# Altium PCB PWR_PCB.PcbDoc
Units mil, origin at the board's own origin, x right, y up, seen from the top; angles counter-clockwise.
Board outline 1730 x 1105 mil, 2 copper layers (Top Layer, Bottom Layer); 30 components, 23 nets, 105 pads, 71 vias.
Unrouted connection lines stored in the file: 28.
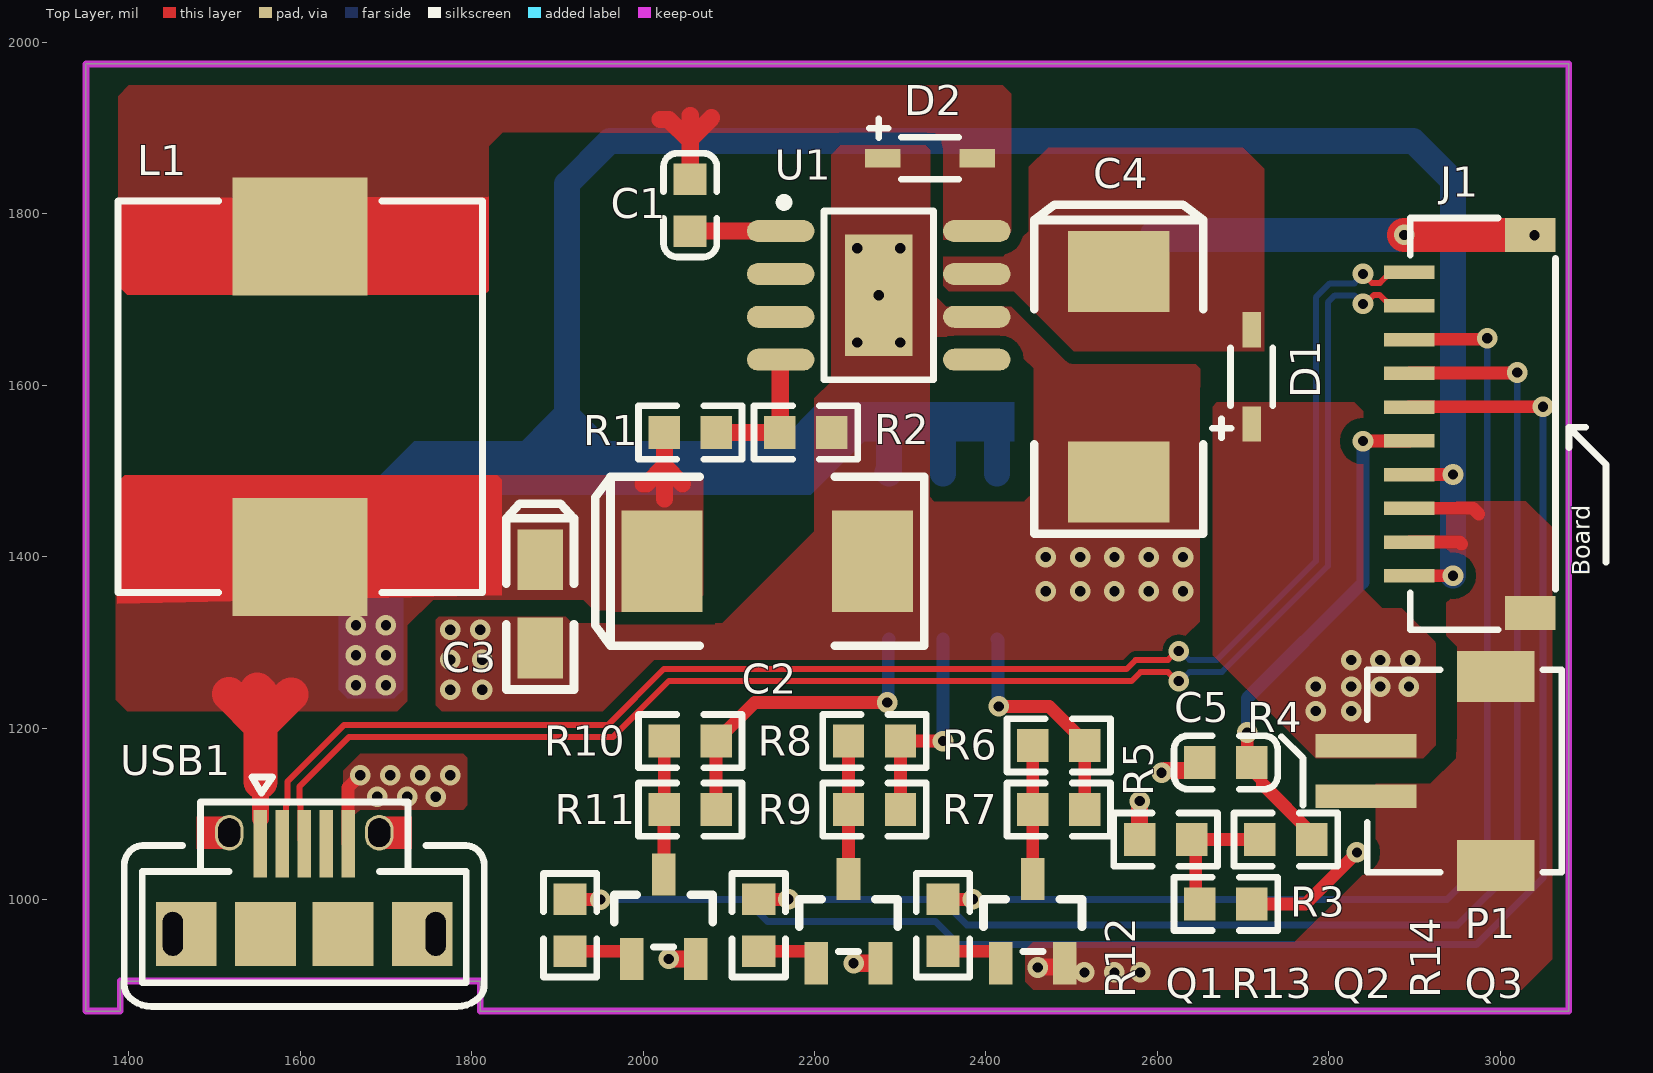
[diagram p0: Top Layer view]
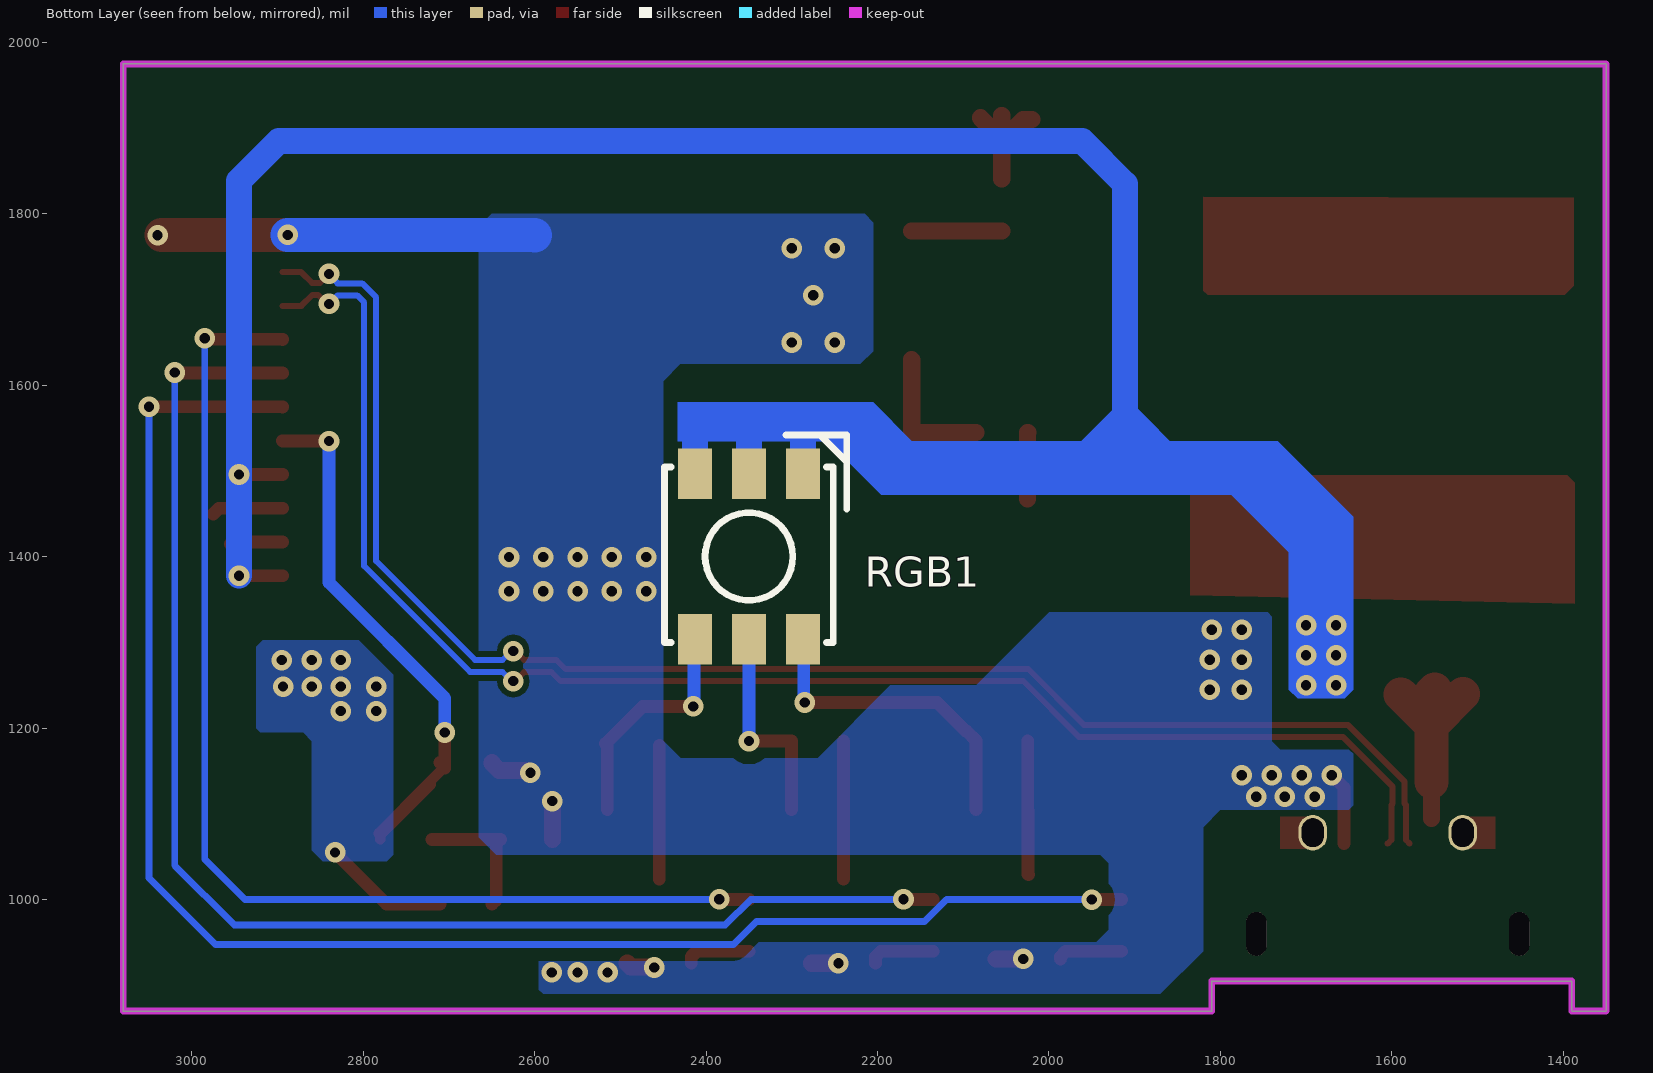
[diagram p1: Bottom Layer view, seen from below]
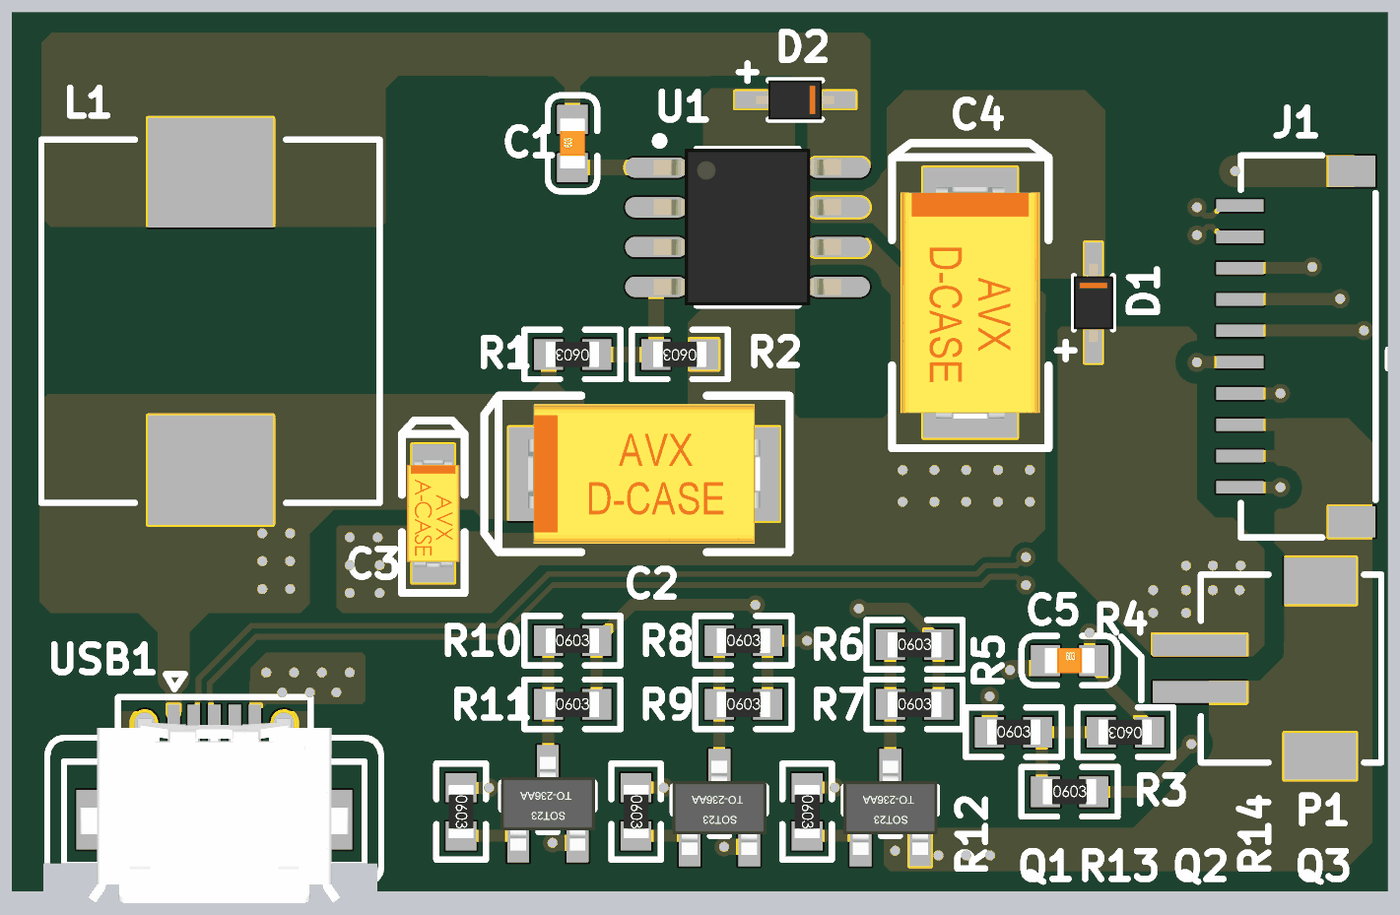
[diagram p2: 3D render of the assembled board from above, using the file's embedded part models]

## Layer stack, top to bottom
Top Solder: solder mask 0.4, Solder Resist, Dk 3.5
Top Layer: signal copper 1.4
Dielectric 1: dielectric 12.6, FR-4, Dk 4.8
Bottom Layer: signal copper 1.4
Bottom Solder: solder mask 0.4, Solder Resist, Dk 3.5

## Board outline
1350,870 1350,1975 3080,1975 3080,870 1810,870 1810,905 1390,905 1390,870

## Design rules (kind name [scope] priority, off if disabled: settings)
Clearance Clearance_1 [InComponent('USB1')] p1: gap=6 ignorepadtopadclearanceinfootprint=TRUE
Clearance DIFF [InDifferentialPairClass('90Ohm')] p2: gap=7 ignorepadtopadclearanceinfootprint=TRUE
Clearance [All] p3: gap=15 ignorepadtopadclearanceinfootprint=TRUE except(0: Arc-Hole Track-Hole SMDPad-Hole THPad-Hole Via-Hole Fill-Hole Poly-Hole Region-Hole Text-Hole; 10: Arc-SMDPad Arc-THPad Arc-Via Arc-Text Track-SMDPad Track-THPad Track-Via Track-Text SMDPad-SMDPad SMDPad-THPad SMDPad-Via SMDPad-Text THPad-THPad THPad-Via THPad-Text Via-Via Via-Text Fill-Text Poly-Text Region-Text Text-Text)
DiffPairsRouting [InDifferentialPairClass('90Ohm')] p1: maxlimit=7 minlimit=7 mostfreqgap=7 toplayer_minwidth=7 toplayer_maxwidth=7 toplayer_prefwidth=7 bottomlayer_minwidth=7 bottomlayer_maxwidth=7 bottomlayer_prefwidth=7 maxuncoupledlength=500
PolygonConnect PolygonConnect_1 [InNetClass('PWR')] p1: connectstyle=Direct reliefconductorwidth=10 reliefentries=4 polygonreliefangle="90 Angle" airgapwidth=10
PolygonConnect VIA [IsVia] p2: connectstyle=Direct reliefconductorwidth=10 reliefentries=4 polygonreliefangle="90 Angle" airgapwidth=10
PolygonConnect [All] p3: connectstyle=Direct reliefconductorwidth=12 reliefentries=4 polygonreliefangle="90 Angle" airgapwidth=15
RoutingVias [All] p1: holewidth=30 width=60 viastyle="Through Hole" minholewidth=12 minwidth=24 maxholewidth=15 maxwidth=30
SolderMaskExpansion [All] p1: expansion=2.5
Width DIFF-90Ohm [InDifferentialPairClass('90Ohm')] p1: maxlimit=8 minlimit=8 preferedwidth=8
Width PWR [InNetClass('PWR')] p2: maxlimit=60 minlimit=15 preferedwidth=30
Width [All] p3: maxlimit=60 minlimit=8 preferedwidth=12
29 further rules are at their usual default settings.

## Classes and differential pairs
net class PE0-2: LED1 LED1_N LED2 LED2_N LED3 LED3_N PE0 PE1 PE2
differential pair class 90Ohm: USB2.0
net class PWR: GND VCC_2S~6S VCC_5.0V VCC_IN
differential pair USB2.0: +OTG_FS_DP -OTG_FS_DM

## Components (designator, comment, footprint, x,y, rotation, side; value= is the part's Value field where it differs from the comment)
C1 "10nF/50V/0603" LC-0603_C 2055,1810.31 r90 top
C2 "47uF/7343" LC-CASE-D_7343 2145,1394.69 r180 top
C3 "10uF/1206" LC-CASE-A_3216 1880,1345 r90 top
C4 "100uF/35V/7343" LC-CASE-D_7343 2555,1610 r90 top
C5 "0.1uF/50V/0603" LC-0603_C 2680,1160 r0 top
D1 "1N5819/SOD-323" SOD_323_F 2710,1610 r90 top
D2 "1N5819/SOD-323" SOD_323_F 2335,1865 r0 top
J1 "USB_S" "SH 1.0-10P" 2964.53,1555 r90 top
L1 "CD54-22uH/2A" L_SMD_10040 1600,1586.69 r270 top
P1 "Comment" "ZH 1.5MM-2P" 2995,1150 r90 top
Q1 "SI2310/SOT-23" LC-SOT-23(SOT-23-3) 2024.06,980 r270 top
Q2 "SI2310/SOT-23" LC-SOT-23(SOT-23-3) 2239.69,975 r270 top
Q3 "SI2310/SOT-23" LC-SOT-23(SOT-23-3) 2454.69,975 r270 top
R1 "51K/1%/0603" LC-0603_R 2055,1545 r180 top
R2 "17K/1%/0603" LC-0603_R 2190,1545 r180 top
R3 "10K/1%/0603" LC-0603_R 2680,995 r0 top
R4 "1K/1%/0603" LC-0603_R 2750,1070 r180 top
R5 "1K/1%/0603" LC-0603_R 2609.68,1070 r0 top
R6 "50R/1%/0603" LC-0603_R 2485,1180 r0 top
R7 "50R/1%/0603" LC-0603_R 2485,1105 r0 top
R8 "50R/0603" LC-0603_R 2270,1185 r0 top
R9 "50R/1%/0603" LC-0603_R 2270,1105 r0 top
R10 "50R/1%/0603" LC-0603_R 2055,1185 r0 top
R11 "50R/1%/0603" LC-0603_R 2055,1105 r0 top
R12 "1K/1%/0603" LC-0603_R 1915,970 r270 top
R13 "1K/1%/0603" LC-0603_R 2135,970 r270 top
R14 "1K/1%/0603" LC-0603_R 2350,970 r270 top
RGB1 "RGB-LED" RGB-5050 2350,1400.32 r90 bottom
U1 "TPS5430" SOIC_8_PAD 2275,1705 r0 top
USB1 "MINI-USB" mini_usb_AB 1604.72,960 r0 top

## Footprints (in the part's own frame and the unit in brackets; to place one, negate y for a bottom-side part, rotate by r counter-clockwise, add the part's x,y. Pads: shape width x height; smd on the part's side, far side on the other; paste and mask are expansions set on the pad)
L_SMD_10040 [mm]
  rect 3.5x4 smd: 1(-4.75,0) 2(4.75,0)
  silkscreen extent -5.8,-5.4 5.8,5.4
LC-0603_C [mm]
  rect 0.93x0.98 smd: 1(-0.77,0) 2(0.77,0)
  silkscreen extent -1.53,-0.79 1.54,0.79, body extent -0.8,-0.4 0.8,0.4, height 0.3
LC-0603_R [mm]
  rect 0.93x0.98 smd: 1(-0.77,0) 2(0.77,0)
  silkscreen extent -1.53,-0.79 1.54,0.79, body extent -0.85,-0.4 0.85,0.4, height 0.56
LC-CASE-A_3216 [mm]
  rect 1.8x1.35 smd: 1(1.31,0) 2(-1.31,0)
  silkscreen extent -2.54,-1 2.97,1, body extent -1.7,-0.84 1.7,0.84, height 1.71
LC-CASE-D_7343 [mm]
  rect 2.4x3 smd: 1(3.12,0) 2(-3.12,0)
  silkscreen extent -4.65,-2.5 5.1,2.5, body extent -3.7,-2.23 3.7,2.22, height 3.01
LC-SOT-23(SOT-23-3) [mm]
  rect 1.25x0.7 smd: 1(1.25,-0.95) 2(-1.25,0) 3(1.25,0.95)
  silkscreen extent -0.65,-1.46 0.9,1.46, body extent -1.5,-1.5 1.5,1.5, height 1.3
mini_usb_AB [mm]
  oval 0.6x1.3 hole 0.6 slot 1.3 at 90 deg: 0(-3.895,0) 0(3.895,0)
  rect 1.8x1.9 smd: 0(-3.5,0) 0(-1.15,0) 0(1.15,0) 0(3.5,0)
  oval 0.85x1.05 hole 0.85 slot 0.65 at 0 deg: 0(-2.22,3) 0(2.22,3)
  rect 0.4x2 smd: 1(-1.3,2.675) 2(-0.65,2.675) 3(0,2.675) 4(0.65,2.675) 5(1.3,2.675)
  Top Layer region: -2.23,3.472 -3.193,3.472 -3.193,2.51 -2.23,2.51
  Top Layer region: 2.23,2.51 3.193,2.51 3.193,3.472 2.23,3.472
  silkscreen extent -5.33,-2.15 5.33,4.65, body extent -4.32,-2.67 4.33,3.23, height 2.85
RGB-5050 [mm]
  rect 1.5x1 smd: 1(2.45,-1.6) 2(2.45,0) 3(2.45,1.6) 4(-2.45,1.6) 5(-2.45,0) 6(-2.45,-1.6)
  silkscreen extent -2.55,-2.9 3.6,2.5, body extent -2.75,-2.5 2.75,2.5, height 1.4
"SH 1.0-10P" [mm]
  rect 1x1.5 smd: 0(-5.6,-1.79) 0(5.6,-1.79)
  rect 0.4x1.5 smd: 1(-4.5,1.79) 2(-3.5,1.79) 3(-2.5,1.79) 4(-1.5,1.79) 5(-0.5,1.79) 6(0.5,1.79) 7(1.5,1.79) 8(2.5,1.79) 9(3.5,1.79) 10(4.5,1.79)
  silkscreen extent -6.1,-4.04 6.1,1.76
SOD_323_F [mm]
  rect 1.05x0.55 smd: 1(-1.4,0) 2(1.4,0)
  silkscreen extent -1.8,-0.63 0.85,1.17, body extent -1.25,-0.63 1.25,0.62, height 1.01
SOIC_8_PAD [mm]
  rect 2x3.6 smd: 0(0,0)
  oval 2x0.65 smd: 1(-2.906,1.905) 2(-2.906,0.635) 3(-2.906,-0.635) 4(-2.906,-1.905) 5(2.906,-1.905) 6(2.906,-0.635) 7(2.906,0.635) 8(2.906,1.905)
  oval 2x0.65 on Mech16: 1(-2.906,1.905) 2(-2.906,0.635) 3(-2.906,-0.635) 4(-2.906,-1.905) 5(2.906,-1.905) 6(2.906,-0.635) 7(2.906,0.635) 8(2.906,1.905)
  silkscreen extent -2.93,-2.5 1.63,2.88, body extent -3,-2.5 3,2.5, height 1.8
"ZH 1.5MM-2P" [mm]
  rect 1.5x2.3 smd: 0(-2.8,0) 0(2.8,0)
  rect 0.7x3 smd: 1(0.75,3.85) 2(-0.75,3.85)
  silkscreen extent -3,-1.95 3,3.81

## Part data
C1 C5: library part Cap, "Capacitor", LatestRevisionDate=17-Jul-2002, LatestRevisionNote="Re-released for DXP Platform.", PackageDescription="Radial Cap, Thru-Hole; 2 Leads; 0.3 in Pin Spacing", PackageReference=RAD-0.3, Published=8-Jun-2000, Publisher="Altium Limited"
C2 C3 C4: library part "Cap Pol2", "Polarized Capacitor (Axial)", LatestRevisionDate=17-Jul-2002, LatestRevisionNote="Re-released for DXP Platform.", PackageDescription="Polarized Capacitor; 2 Leads", PackageReference=POLAR0.8, Published=8-Jun-2000, Publisher="Altium Limited"
D1 D2: library part 1N5819
Q1 Q2 Q3: library part SI2310
R1 R2 R3 R4 R5 R6 R7 R8 R9 R10 R11 R12 R13 R14: library part Res2, "Resistor", LatestRevisionDate=17-Jul-2002, LatestRevisionNote="Re-released for DXP Platform.", PackageDescription="Axial Device, Thru-Hole; 2 Leads; 0.4 in Pin Spacing", PackageReference=AXIAL-0.4, Published=8-Jun-2000, Publisher="Altium Limited"
RGB1: library part RGB-5050

## Via types
v1: diameter 24, hole 12, Top Layer to Bottom Layer, tented both sides, 71 vias

## Nets (pads, with @x,y where several pads share a name; then routed paths per layer and width w, separated by ;. In a path a pad name is that pad's centre, name@x,y a point inside that pad or via, vN(x,y) a via of type N, cw(c..) or ccw(c..) an arc to the next point about the centre after c; other vN are vias at no path point)
GND: C2.2 C3.2 C4.2 C5.1 D2.1 J1.0 J1.2 J1.3 P1.0 P1.2 Q1.3 Q2.3 Q3.3 R2.1 R5.1 U1.0 U1.6@2389.43,1680 USB1.5 | length 858.1
  Top Layer w15: USB1.5 1655.91,1130.91 v1(1670,1145) ; J1.2 2952.8,1417.2 2955,1415 ; J1.3 2968.43,1456.57 2975,1450
  Top Layer w20: v1(2030,930.79) Q1.3 ; v1(2245.63,925.79) Q2.3 ; v1(2460.63,920.79) 2461.39,921.55 2488.31,921.55 2492.09,925.33 Q3.3 ; R5.1 v1(2579.37,1115) ; v1(2605,1148.11) 2606.08,1148.11 2608.68,1150.71 2641.38,1150.71 2649.69,1159.02 C5.1
  Top Layer w40: v1(2888.02,1775.47) J1.0@3035,1775.47
  Bottom Layer w40: 2600,1775 2600.47,1775.47 v1(2888.02,1775.47)
  other v1: 2515,915 2550,915 2580,915 1690,1120 1725,1120 1758.07,1120 1705,1145 1740,1145 1775,1145 1775,1245 1812.5,1245 1775,1280 1812.5,1280 1775,1315 1810,1315 2470,1359.69 2510,1359.69 2550,1359.69 2590,1359.69 2630,1359.69 2470,1399.69 2510,1399.69 2550,1399.69 2590,1399.69 2630,1399.69 2250,1650 2300,1650 2275,1705 2250,1760 2300,1760 3040,1775
LED1: Q1.2 R10.1 R11.1 | length 156
  Top Layer w15: Q1.2 2024.37,1029.53 2024.37,1104.69 R11.1 R10.1
LED1_N: R10.2 R11.2 RGB1.6 | length 373.6
  Top Layer w15: R11.2 R10.2 2085.32,1185.98 2096.12,1196.79 2097.11,1196.79 2130.32,1230 v1(2285,1230)
  Bottom Layer w15: v1(2285,1230) 2286,1231 2286,1302.85 RGB1.6
LED2: Q2.2 R8.1 R9.1 | length 160.8
  Top Layer w15: Q2.2 R9.1 R8.1
LED2_N: R8.2 R9.2 RGB1.5 | length 248.5
  Top Layer w15: R9.2 R8.2 v1(2350,1185)
  Bottom Layer w15: v1(2350,1185) RGB1.5
LED3: Q3.2 R6.1 R7.1 | length 155.8
  Top Layer w15: Q3.2 R7.1 R6.1
LED3_N: R6.2 R7.2 RGB1.4 | length 276.3
  Top Layer w15: v1(2415,1225.39) 2473.86,1225.39 R6.2@2517.28,1181.96 ; R7.2 R6.2 R6.2@2515.32,1181.72
  Bottom Layer w15: RGB1.4 2414,1302.85 2414,1226.39 v1(2415,1225.39)
NetC1_1: C1.1 U1.1@2160.57,1780 | length 105.6
  Top Layer w20: C1.1 U1.1@2160.57,1780
NetC1_2: C1.2 D2.2 L1.1 U1.8@2389.43,1780 | length 155.1
  Top Layer w20: 2020,1910 2030,1910 2055,1885 ; C1.2 2055,1915 ; 2055,1887.19 2080,1912.19
NetQ1_1: Q1.1 R12.2 | length 76.9
  Top Layer w15: R12.2 1980.38,939.68 1986.66,933.41 Q1.1
NetQ2_1: Q2.1 R13.2 | length 77.5
  Top Layer w15: R13.2 2196,939.68 2202.28,933.41 Q2.1
NetQ3_1: Q3.1 R14.2 | length 77.5
  Top Layer w15: R14.2 2411,939.68 2417.28,933.41 Q3.1
NetR1_1: R1.1 R2.2 U1.4@2160.57,1630 | length 159.7
  Top Layer w20: R1.1 R2.2 2160.13,1545.44 2160.13,1629.56 U1.4@2160.57,1630
NetR3_1: R3.1 R4.2 R5.2 | length 158.7
  Top Layer w15: R3.1 2644.84,999.84 2644.84,1065.16 R5.2 R4.2
OTG_FS_DM: J1.10 USB1.2 | length 1828.3
  Top Layer w7: USB1.2 1583.35,1069.53 1583.35,1110.28 1584.93,1111.86 1584.93,1137.6 1651.33,1204 1959.36,1204 2024.36,1269 2564.2,1269 2574.7,1279.5 2612.4,1279.5 2622.9,1290 v1(2625,1290) ; v1(2840,1730) 2850.52,1719.48 2859.72,1719.48 2872.4,1732.17 J1.10
  Bottom Layer w7: v1(2625,1290) 2627.1,1290 2637.6,1279.5 2669.5,1279.5 2785,1395 2785,1702.6 2801.4,1719 2830,1719 2840,1729 v1(2840,1730)
OTG_FS_DP: J1.9 USB1.3 | length 1804.1
  Top Layer w7: USB1.3 1600.51,1069.53 1600.51,1110.28 1598.93,1111.86 1598.93,1131.8 1657.13,1190 1965.16,1190 2030.16,1255 2570,1255 2580.5,1265.5 2612.4,1265.5 2622.9,1255 v1(2625,1255) ; v1(2840,1695) 2842.12,1695 2852.6,1705.48 2859.52,1705.48 2872.2,1692.8 J1.9
  Bottom Layer w7: v1(2625,1255) 2627.1,1255 2637.6,1265.5 2675.3,1265.5 2799,1389.2 2799,1696.8 2807.2,1705 2830,1705 v1(2840,1695)
PE0: J1.6 R12.1 | length 1895.1
  Top Layer w15: R12.1 1915.31,1000 v1(1950,1000) ; J1.6 2894.37,1575 v1(3050,1575)
  Bottom Layer w8: v1(1950,1000) 2119.31,1000 2145,974.31 2341.39,974.31 2368.2,947.5 2972.5,947.5 3050,1025 v1(3050,1575)
PE1: J1.7 R13.1 | length 1627.5
  Top Layer w15: R13.1 v1(2169.69,1000.31) ; J1.7 2894.43,1614.43 3019.43,1614.43 v1(3020,1615)
  Bottom Layer w8: v1(2169.69,1000.31) 2347.92,1000.31 2377.73,970.5 2950.5,970.5 3020,1040 v1(3020,1615)
PE2: J1.8 R14.1 | length 1353.8
  Top Layer w15: R14.1 v1(2384.69,1000.31) ; J1.8 2894.43,1653.8 2983.8,1653.8 v1(2985,1655)
  Bottom Layer w8: v1(2384.69,1000.31) 2938.11,1000.31 2985,1047.21 v1(2985,1655)
Power_Input: C5.2 J1.5 R4.1 | length 612.2
  Top Layer w12: C5.2@2705,1153.74 2705.98,1153.74 2722.94,1136.79 2722.94,1134.56 ; R4.1 R4.1@2780.31,1077.19
  Top Layer w15: C5.2@2705,1153.74 C5.2@2705,1160 ; v1(2705,1195) C5.2@2705,1160 ; C5.2 C5.2@2705,1160 ; 2722.94,1134.56 R4.1@2780.31,1077.19 ; v1(2840,1535) 2840.16,1535.16 2893.9,1535.16 J1.5
  Bottom Layer w15: v1(2705,1195) 2705,1235 2840,1370 v1(2840,1535)
VCC_2S~6S: D1.1 P1.1 R3.2 | length 147.5
  Top Layer w15: R3.2 2772.95,995 v1(2832.95,1055)
  other v1: 2785,1220 2826.38,1220 2785,1248.59 2826.38,1248.59 2860,1248.59 2893.62,1248.59 2826.38,1279.5 2860,1279.5 2895,1279.5
VCC_5.0V: C2.1 C3.1 J1.1 J1.4 L1.2 R1.2 RGB1.1 RGB1.2 RGB1.3 USB1.1 | length 2692.7
  Top Layer w15: J1.1 v1(2945,1377.83) ; J1.4@2894.43,1496.32 J1.4 v1(2945,1495.94)
  Top Layer w20: USB1.1@1553.54,1094.69 1553.54,1137.6 ; 2000,1485 2003.91,1485 2025,1506.09 2046.09,1485 ; R1.2 2025,1544.68 2025,1467.5
  Top Layer w40: 1516.92,1240 1553.54,1203.38 ; 1550,1245 1553.54,1241.46 1553.54,1137.6 ; 1552.92,1202.76 1589.54,1239.38
  Bottom Layer w30: 1845,1510 1855,1510 1910,1565 1911.25,1565 1966.25,1510 ; 1911.25,1510 1911.25,1835 1961.25,1885 2898.56,1885 2945,1838.56 v1(2945,1495.94) v1(2945,1377.83) ; RGB1.1@2285,1498.78 RGB1.1 2287.01,1545 ; RGB1.2 2350,1555 ; RGB1.3 2412.99,1555
  other v1: 1665,1250 1700,1250 1665,1285 1700,1285 1665,1320 1700,1320
VCC_IN: C4.1 D1.2 U1.7@2389.43,1730
pads on no net: U1.1@2160.57,1780 U1.2 U1.3 U1.4@2160.57,1630 U1.5 U1.6@2389.43,1680 U1.7@2389.43,1730 U1.8@2389.43,1780 USB1.0 USB1.4

## Polygon pours and split planes (outlines as drawn)
GND on Top Layer "GND_L01_P040" (solid, remove dead copper, pour order 40): 2918.65,1135 2948.68,1165.04 2950,1195 2950,1295 2937.3,1307.7 2937.3,1453.61 2948.68,1465 3030,1465 3065,1430 3065,935 3025,895 2455,895 2445,905 2445,940.31 2454.69,950 2760,950 2855,1045 2855,1135
VCC_2S~6S on Top Layer "VCC_2S~6S_L01_P002" (solid, remove dead copper, pour order 2): 2664.77,1285.23 2664.77,1295.23 2664.77,1575.16 2669.61,1580 2830,1580 2840.16,1569.84 2840.16,1362.34 2862.5,1340 2885,1340 2925,1300 2925,1190 2925,1179.85 2910.15,1165 2785,1165
GND on Top Layer "Top Layer-GND" (solid, remove dead copper, pour order 20): 1758.07,1226.93 1765,1220 1953.11,1220 2013.11,1280 2605,1280 2655,1330 2655,1525 2649.47,1530.53 2649.47,1550 2649.84,1619.63 2644.15,1625.33 2499.67,1625.33 2433.54,1691.46 2353.54,1691.46 2335,1710 2335,1875 2330,1880 2230,1880 2219.33,1869.33 2219.33,1604.33 2200,1585 2200,1430 2092.5,1322.5 1917.5,1322.5 1910,1330 1761.82,1330 1758.07,1326.25
no net on Top Layer "NONET_L01_P046" (solid, remove dead copper, pour order 46): 2862.59,1180
no net on Top Layer "NONET_L01_P044" (solid, remove dead copper, pour order 44): 2664.77,1275
GND on Top Layer "GND_L01_P042" (solid, remove dead copper, pour order 42): 1650,1150.32 1670,1170.32 1790,1170.32 1795,1165.32 1795,1110 1790,1105 1670,1105 1665,1100 1650,1100
VCC_5.0V on Top Layer "VCC_5.0V_L01_P028" (solid, remove dead copper, pour order 28): 1391.73,1226.73
VCC_5.0V on Top Layer "VCC_5.0V_L01_P026" (solid, remove dead copper, pour order 26): 1930,1350 1945,1335 2050,1335 2070,1355 2070,1495 1395,1495 1385,1485 1385,1233.46 1398.46,1220 1713.47,1220 1725,1231.53 1725,1320 1755,1350
NetC1_2 on Top Layer "NETC1_2_L01_P024" (solid, remove dead copper, pour order 24): 2055,1455
NetC1_2 on Top Layer "NETC1_2_L01_P022" (solid, remove dead copper, pour order 22): 1805,1705.48 1820,1720.48 1820,1879.09 1836.2,1895.29 1950,1895.29 1950.29,1895 2340.29,1895 2348.75,1886.54 2348.75,1770 2425,1770 2429.71,1774.71 2429.71,1940 2419.71,1950 1400,1950 1387.5,1937.5 1387.5,1716.33 1398.35,1705.48
VCC_IN on Top Layer "VCC_IN_L01_P014" (solid, remove dead copper, pour order 14): 2725,1852.5 2700,1877.5 2472.5,1877.5 2450,1855 2450,1780 2420,1750 2350,1750 2347.5,1747.5 2347.5,1712.5 2350,1710 2432.8,1710 2502.8,1640 2725,1640
VCC_IN on Top Layer "VCC_IN_L01_P012" (solid, remove dead copper, pour order 12): 2722.27,1650
GND on Top Layer "GND_L01_P010" (solid, remove dead copper, pour order 10): 2664.77,1637.26
VCC_2S~6S on Top Layer "VCC_2S~6S_L01_P006" (solid, remove dead copper, pour order 6): 2822.38,1150
no net on Top Layer "NONET_L01_P000" (solid, remove dead copper, pour order 0): 2925,1160
VCC_2S~6S on Bottom Layer "VCC_2S~6S_L02_P004" (solid, remove dead copper, pour order 4): 2765,1250.5 2765,1266.45 2801.4,1302.85 2917.15,1302.85 2925,1295 2925,1200 2920,1195 2870,1195 2860,1185 2860,1057.5 2847.5,1045 2772.5,1045 2765,1052.5 2765,1060
GND on Bottom Layer "GND_L02_P038" (solid, remove dead copper, pour order 38): 1940,1052.5 1930,1042.5 1930,965 1945,950 2585,950 2595,940 2595,895 2590,890 1870,890 1820,940 1820,1084.69 1800,1104.69 1650.31,1104.69 1645,1110 1645,1170 1650,1175 1730,1175 1740,1185 1740,1330 1745,1335 1999.69,1335 2084.68,1250 2185.31,1250 2270,1165 2429.68,1165 2450,1185.32 2450,1605 2430,1625 2220,1625 2205,1640 2205,1790 2215,1800 2650,1800 2665,1785 2665,1072.5 2645,1052.5
VCC_5.0V on Bottom Layer "VCC_5.0V_L02_P036" (solid, remove dead copper, pour order 36): 1840,1785
VCC_5.0V on Bottom Layer "VCC_5.0V_L02_P034" (solid, remove dead copper, pour order 34): 1680,1230

## Keep-outs
Keep-Out Layer:
  lines w7.87: 1350,870 1390,870 1390,905 1810,905 1810,870 2095,870 3080,870 3080,1975 1350,1975 1350,870

## Other copper
Top Layer:
  region net VCC_5.0V: 1385,1233.46
  region: 1380,1231.53
  region: 1545,1115
  region net VCC_5.0V: 1386.35,1345 1386.35,1486.35 1395,1495 1830,1495 1835,1490 1835,1355
  region net NetC1_2: 1387.5,1818.97 1387.5,1716.33 1398.35,1705.48 1815,1705.48 1820,1710.48 1820,1820
  pour cut-out: 2445,1465.31 2455,1475 2455,1620.08 2425.08,1650 2360,1650 2355,1655 2355,1656.25 2341.25,1656.25 2335,1650 2335,1470 2340,1465 2445,1465
Bottom Layer:
  region net VCC_5.0V: 2195.53,1472.34 1787.34,1472.34 1720,1405 1720,1245 1710,1235 1655,1235 1645,1245 1645,1446.81 1733.19,1535 2160,1535 2205,1580 2433.19,1580 2433.19,1535 2258.19,1535
Multi-Layer:
  pour cut-out: 1390,1815 1815,1815 1815,1360 1810,1360 1385,1360

## Silkscreen, mask and mechanical layers (free items; w line width, h text height)
Top Overlay:
  lines w7.87: 2745,1190 2770,1165 2770,1110

## Text inside footprints (layer, text, board x,y; h text height)
J1: Top Overlay "Board" at 3111.77,1377.83 h35 r90